# Altium PCB PCB2.PcbDoc (part 2 of 2)
Units mil, origin at the board's own origin, x right, y up, seen from the top; angles counter-clockwise.
Board outline 3235 x 2995 mil, 2 copper layers (Top Layer, Bottom Layer); 162 components, 122 nets, 435 pads, 185 vias.
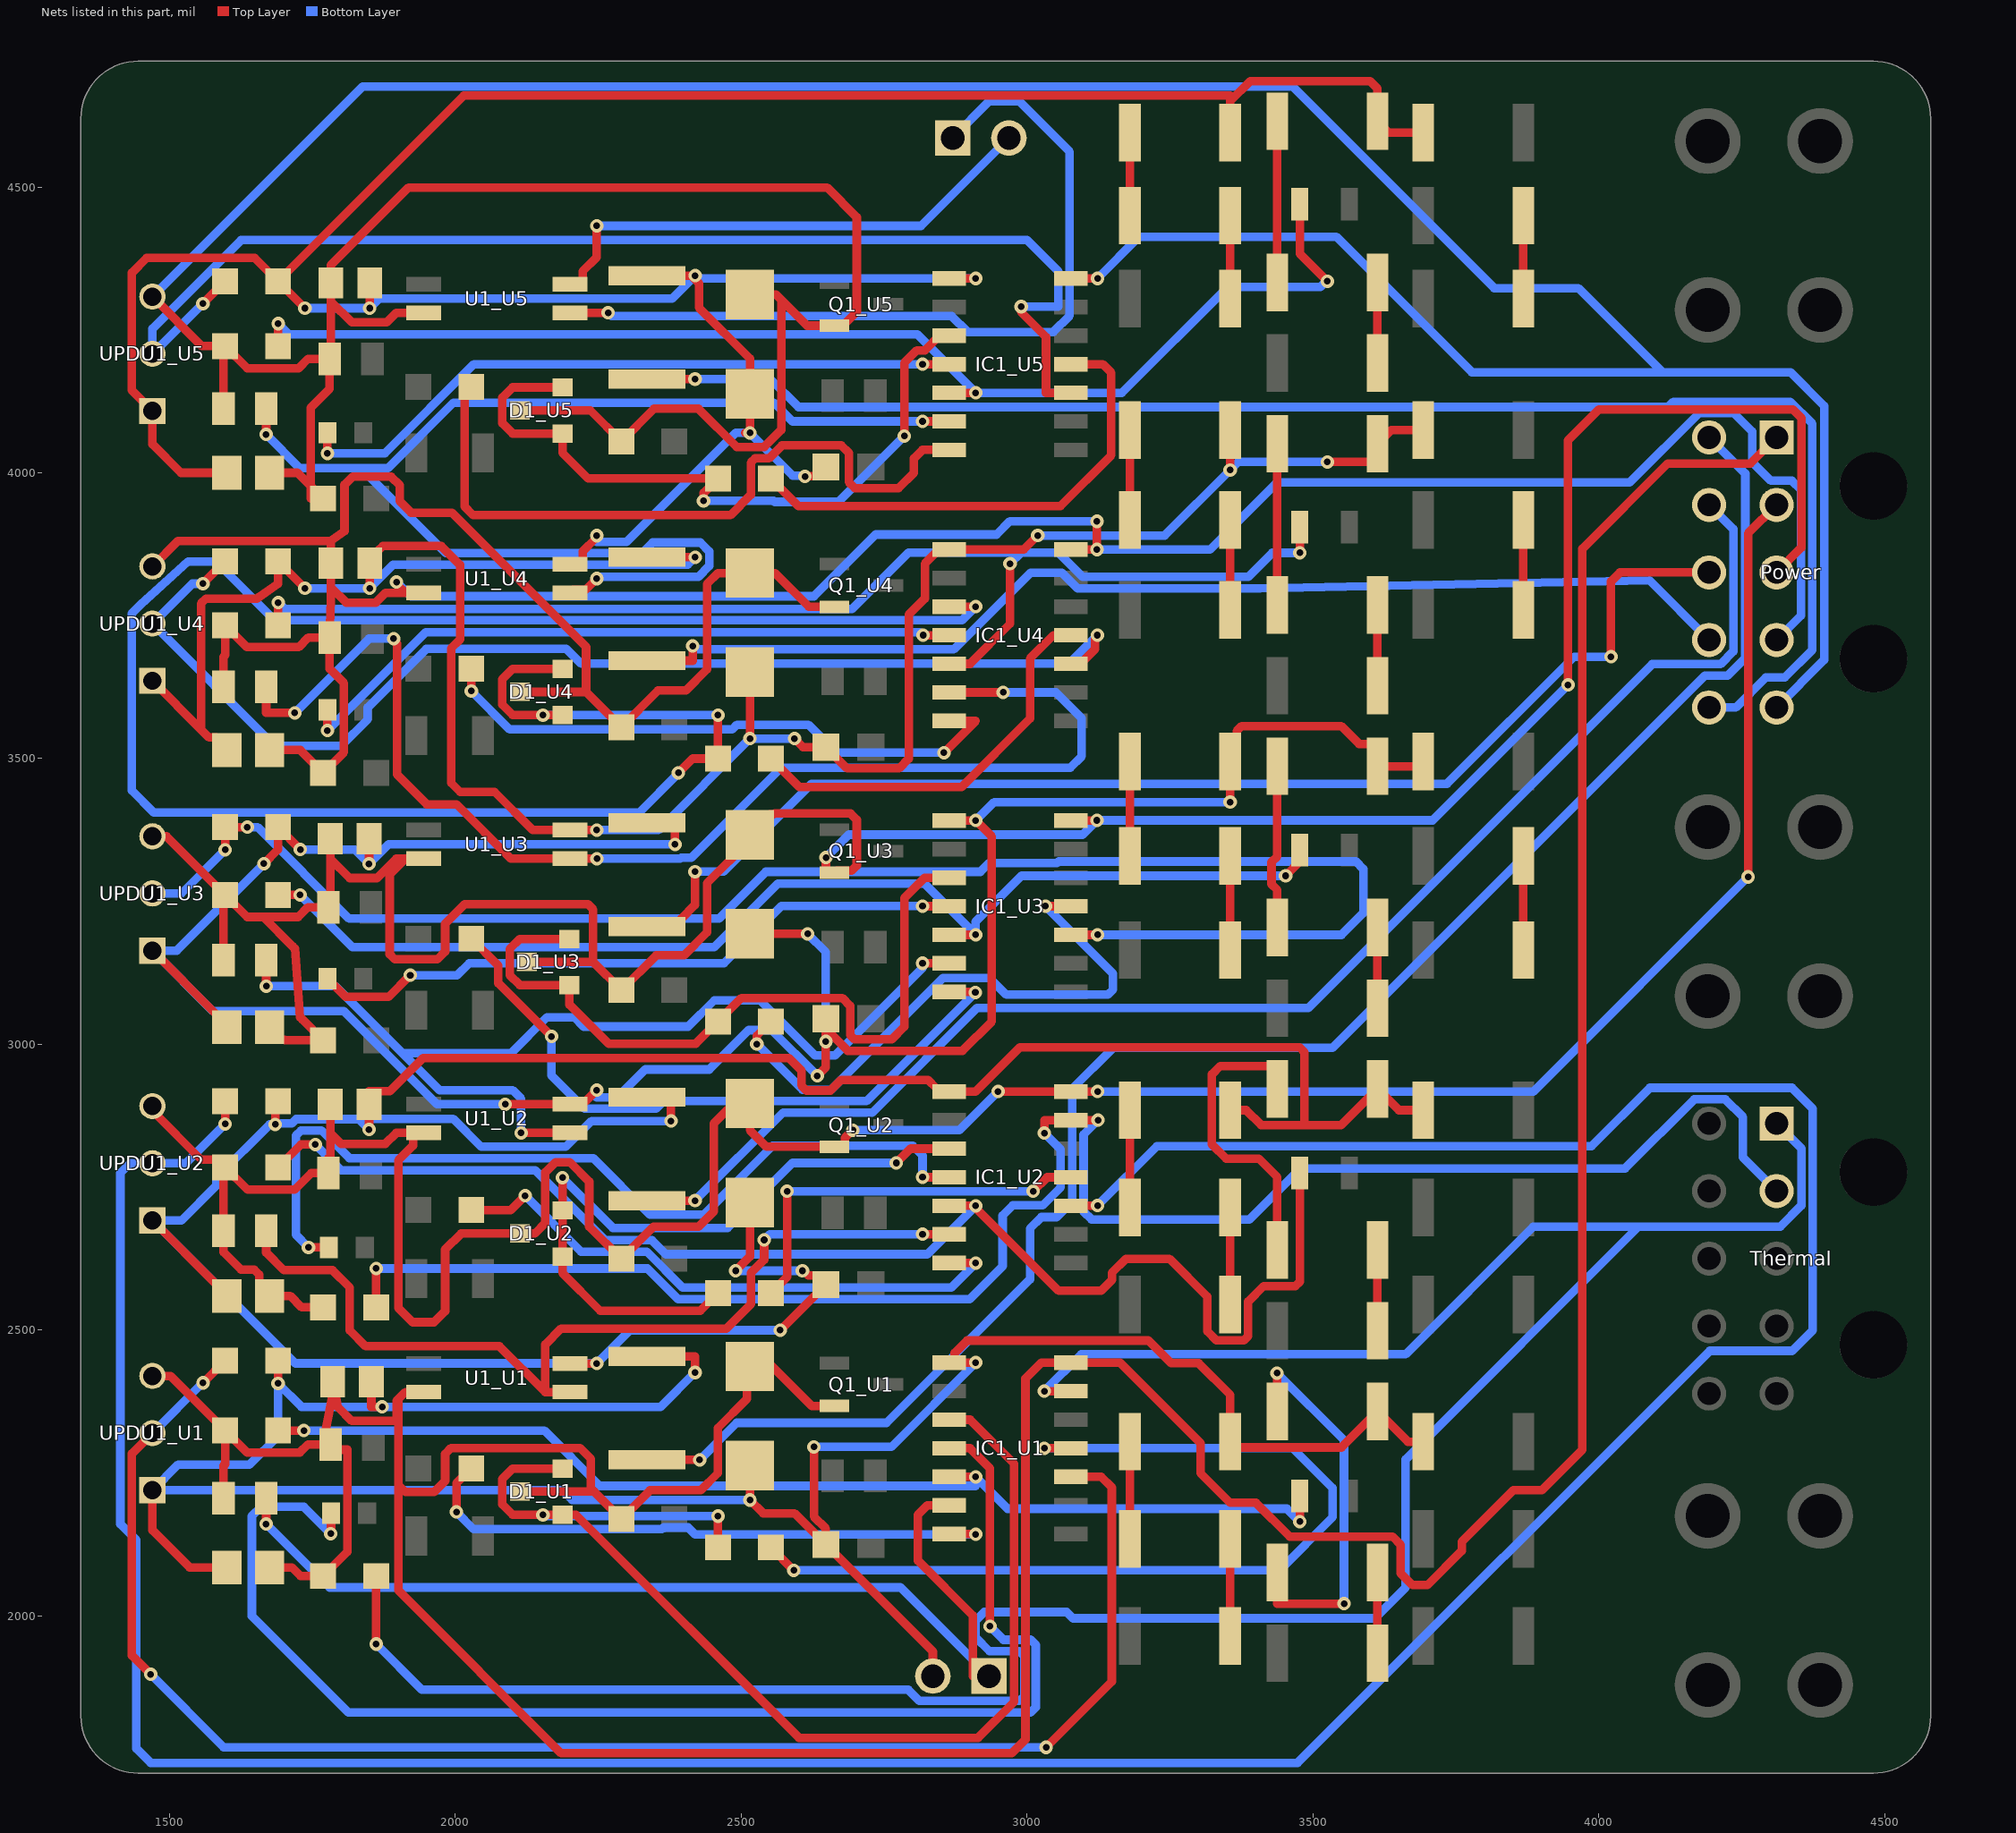
[diagram p2: the nets of this part, all layers, seen from the top]

## Via types
v1: diameter 23.62, hole 11.81, Top Layer to Bottom Layer, 183 vias
v2: diameter 23.62, hole 11.81, Top Layer to Bottom Layer, tented both sides, 2 vias

## Nets (pads, with @x,y where several pads share a name; then routed paths per layer and width w, separated by ;. In a path a pad name is that pad's centre, name@x,y a point inside that pad or via, vN(x,y) a via of type N, cw(c..) or ccw(c..) an arc to the next point about the centre after c; other vN are vias at no path point) (continued)
NetR8_U3_2: R8_U3.2 R10_U3.1 | length 165
  Top Layer w15: R10_U3.1@3867.68,3165 R8_U3.2@3867.68,3330
NetR8_U4_2: R8_U4.2 R10_U4.1 | length 157.5
  Top Layer w15: R10_U4.1@3867.68,3760 R8_U4.2@3867.68,3917.5
NetR8_U5_2: R8_U5.2 R10_U5.1 | length 145
  Top Layer w15: R10_U5.1@3867.68,4305 R8_U5.2@3867.68,4450
NetR22_U1_2: R22_U1.2 R25_U1.1 | length 690
  Top Layer w15: v1(3437,2425) 3437.32,2424.68 R22_U1.2@3437.32,2358.16 ; R25_U1.1@3437.32,2076.05 3437.32,2021.68 v1(3554.15,2021.68)
  Bottom Layer w15: v1(3437,2425) 3554.15,2307.85 v1(3554.15,2021.68)
NetR22_U2_2: R22_U2.2 R25_U2.1 | length 548.1
  Top Layer w15: R25_U2.1@3437.32,2640.26 3437.32,2768 3405.32,2800 3348,2800 3323,2825 3323,2947.5 3337.5,2962 3437.32,2962 R22_U2.2@3437.32,2922.37
NetR22_U3_2: R22_U3.2 R25_U3.1 | length 290.3
  Top Layer w15: R25_U3.1@3437.32,3204.47 3437.32,3270.33 3427.38,3280.28 3427.38,3318.96 3437.32,3328.9 R22_U3.2@3437.32,3486.58
NetR22_U4_2: R22_U4.2 R25_U4.1 | length 282.1
  Top Layer w15: R25_U4.1@3437.32,3768.68 R22_U4.2@3437.32,4050.79
NetR22_U5_2: R22_U5.2 R25_U5.1 | length 282.1
  Top Layer w15: R25_U5.1@3437.32,4332.89 R22_U5.2@3437.32,4615
NetR24_U1_2: R24_U1.2 R26_U1.1 | length 170
  Top Layer w15: R26_U1.1@3179.65,2135 R24_U1.2@3179.65,2305
NetR24_U2_2: R24_U2.2 R26_U2.1 | length 170
  Top Layer w15: R26_U2.1@3179.65,2715 R24_U2.2@3179.65,2885
NetR24_U3_2: R24_U3.2 R26_U3.1 | length 165
  Top Layer w15: R26_U3.1@3179.65,3330 R24_U3.2@3179.65,3495
NetR24_U4_2: R24_U4.2 R26_U4.1 | length 157.5
  Top Layer w15: R26_U4.1@3179.65,3917.5 R24_U4.2@3179.65,4075
NetR24_U5_2: R24_U5.2 R26_U5.1 | length 145
  Top Layer w15: R26_U5.1@3179.65,4450 R24_U5.2@3179.65,4595
NetR25_U1_2: R25_U1.2 R27_U1.1 | length 141.1
  Top Layer w15: R27_U1.1@3612.68,1935 R25_U1.2@3612.68,2076.05
NetR25_U2_2: R25_U2.2 R27_U2.1 | length 141.1
  Top Layer w15: R27_U2.1@3612.68,2499.21 R25_U2.2@3612.68,2640.26
NetR25_U3_2: R25_U3.2 R27_U3.1 | length 141.1
  Top Layer w15: R27_U3.1@3612.68,3063.42 R25_U3.2@3612.68,3204.47
NetR25_U4_2: R25_U4.2 R27_U4.1 | length 141.1
  Top Layer w15: R27_U4.1@3612.68,3627.63 R25_U4.2@3612.68,3768.68
NetR25_U5_2: R25_U5.2 R27_U5.1 | length 141.1
  Top Layer w15: R27_U5.1@3612.68,4191.84 R25_U5.2@3612.68,4332.89
NetR26_U1_2: R26_U1.2 R28_U1.1 | length 170
  Top Layer w15: R28_U1.1@3355,1965 R26_U1.2@3355,2135
NetR26_U2_2: R26_U2.2 R28_U2.1 | length 170
  Top Layer w15: R28_U2.1@3355,2545 R26_U2.2@3355,2715
NetR26_U3_2: R26_U3.2 R28_U3.1 | length 165
  Top Layer w15: R28_U3.1@3355,3165 R26_U3.2@3355,3330
NetR26_U4_2: R26_U4.2 R28_U4.1 | length 157.5
  Top Layer w15: R28_U4.1@3355,3760 R26_U4.2@3355,3917.5
NetR26_U5_2: R26_U5.2 R28_U5.1 | length 145
  Top Layer w15: R28_U5.1@3355,4305 R26_U5.2@3355,4450
NetTx_1: Tx.1 U1_U5.3 | length 1454.7
  Top Layer w15: U1_U5.3@2200.04,4280.02 v1(2267,4280.02)
  Bottom Layer w15: v1(2267,4280.02) 2273.02,4274 2868,4274 2895.69,4246.31 3045.59,4246.31 3074.27,4275 3074.27,4561.56 2985.84,4650 2933.84,4650 Tx.1@2869.51,4585.67
NetTx_2: Tx.2 U1_U5.4 | length 916.1
  Top Layer w15: U1_U5.4@2200.04,4330.02 2217.31,4330.02 2222.6,4335.31 2222.6,4352.58 2247,4376.98 v1(2247,4432)
  Bottom Layer w15: v1(2247,4432) 2814.26,4432 Tx.2@2967.93,4585.67
PA3_U1: IC1_U1.13 R21_U1.2 Thermal.1 | length 4746.3
  Top Layer w15: v1(1861.26,1951) R21_U1.2@1861.26,2070 ; v1(3029.96,2393.45) IC1_U1.13@3076.3,2393.45
  Bottom Layer w15: v1(1861.26,1951) 1941.26,1871 2792,1871 2811.5,1851.5 2986.21,1851.5 2995,1860.28 2995,1929.72 2986.21,1938.5 2934,1938.5 2910,1962.5 2910,1992 2925,2007 3069,2007 3080,1996 3608,1996 3662,2050 3662,2274 4069.09,2681.09 ; v1(3029.96,2393.45) 3094.52,2458 3662,2458 3885.09,2681.09 4069.09,2681.09 ; Thermal.1@4310.71,2861.62 4354,2818.33 4354,2718 4317.09,2681.09 4069.09,2681.09
PA3_U2: IC1_U2.13 R21_U2.2 Thermal.2 | length 3227.3
  Top Layer w15: R21_U2.2@1861.26,2540 v1(1861.26,2608) ; v1(3030,2844.73) 3030,2867.58 IC1_U2.13@3076.3,2867.58 v1(3124,2867.58)
  Bottom Layer w15: v1(1861.26,2608) 2335.71,2608 2389.1,2554.62 2899.62,2554.62 2957,2612 2957,2700.69 2975,2718.69 3027.38,2718.69 3058.69,2750 3058.69,2816.04 v1(3030,2844.73) ; v1(3124,2867.58) 3098.69,2842.27 3098.69,2707.5 3112.5,2693.69 3388.69,2693.69 3478,2783 4045.68,2783 4166.72,2904.04 4220.96,2904.04 4252,2873 4252,2802.22 Thermal.2@4310.71,2743.51
PA6_U1: D4_U1.2 IC1_U1.4 | length 2384.8
  Top Layer w15: v1(1782,2144) 1782.48,2144.48 D4_U1.2@1782.48,2180 ; IC1_U1.4@2863.7,2293.45 2900,2293.45 2935,2258.45 v1(2935,1982)
  Bottom Layer w15: v1(1782,2144) 1735,2191 1660,2191 1644,2175 1644,2000 1812.5,1831.5 3006.21,1831.5 3015,1840.28 3015,1949.72 3006.21,1958.5 2958.5,1958.5 v1(2935,1982)
PA6_U2: D4_U2.2 IC1_U2.4 | length 1542.5
  Top Layer w15: v1(1743,2645) D4_U2.2@1778.5,2645 ; v1(2817,2768) 2817.42,2767.58 IC1_U2.4@2863.7,2767.58
  Bottom Layer w15: v1(1743,2645) 1720.86,2667.14 1720.86,2840.41 1729.76,2849.31 1766,2849.31 1814.33,2800.98 2241.02,2800.98 2340,2702 2434,2702 2554.69,2822.69 2800,2822.69 2817,2805.69 v1(2817,2768)
PA6_U3: D4_U3.2 IC1_U3.4 | length 1168.7
  Top Layer w15: D4_U3.2@1776.14,3115 1776.14,3112.05 1784.39,3103.8 1787.34,3103.8 1808.14,3083 1883,3083 v1(1921,3121) ; v1(2817,3242) 2817,3241.72 IC1_U3.4@2863.7,3241.72
  Bottom Layer w15: v1(1921,3121) 2003,3121 2024,3142 2469.82,3142 2569.82,3242 v1(2817,3242)
PA6_U4: D4_U4.2 IC1_U4.4 | length 1197
  Top Layer w15: v1(1776.14,3549.14) D4_U4.2@1776.14,3585 ; v1(2818,3716) 2818.14,3715.86 IC1_U4.4@2863.7,3715.86
  Bottom Layer w15: v1(1776.14,3549.14) 1948.31,3721.31 2812.69,3721.31 v1(2818,3716)
PA6_U5: D4_U5.2 IC1_U5.4 | length 1188.2
  Top Layer w15: v1(1776.14,4034) D4_U5.2@1776.14,4070 ; v1(2817,4190) IC1_U5.4@2863.7,4190
  Bottom Layer w15: v1(1776.14,4034) 1876.38,4034 2032.38,4190 v1(2817,4190)
PA7_U1: IC1_U1.5 R19_U1.2 R20_U1.2 | length 1966.3
  Top Layer w15: R20_U1.2@1689.76,2324.44 v1(1735,2324.44) ; IC1_U1.5@2863.7,2243.45 v1(2910,2243.45) ; v1(3476.69,2165.31) R19_U1.2@3476.69,2210
  Bottom Layer w15: v1(1735,2324.44) 2155.56,2324.44 2252.42,2227.58 2910,2227.58 v1(2910,2243.45) 2965.69,2187.76 3454.24,2187.76 v1(3476.69,2165.31)
PA7_U2: IC1_U2.5 R19_U2.2 R20_U2.2 | length 2423.1
  Top Layer w15: R20_U2.2@1689.76,2785.06 1729.7,2825 v1(1755,2825) ; IC1_U2.5@2863.7,2717.58 v1@2906.42,2717.58 ; v1(2910.04,2717.58) v1@2906.42,2717.58 ; R19_U2.2@3476.69,2775 3476.69,2584.69 3469,2577 3413.36,2577 3386.36,2550 3386.36,2489.46 3379.04,2482.14 3330.96,2482.14 3315,2498.1 3315,2558.64 3248.64,2625 3172.75,2625 3148.28,2600.54 3148.28,2587.78 3129.5,2569 3055,2569 v1@2906.42,2717.58
  Bottom Layer w15: v1(1755,2825) 1800,2780 2139.6,2780 2262.18,2657.42 2343.58,2657.42 2368,2633 2825.45,2633 v1(2910.04,2717.58)
PA7_U3: IC1_U3.5 R19_U3.2 R20_U3.2 | length 2041.1
  Top Layer w15: R20_U3.2@1689.76,3261.54 v1(1728.46,3261.54) ; IC1_U3.5@2863.7,3191.72 v1(2910.04,3191.72) v1@2910,3191.76 ; v1(3452,3295) 3476.69,3319.69 R19_U3.2@3476.69,3340
  Bottom Layer w15: v1(1728.46,3261.54) 1820,3170 2452.58,3170 2563.58,3281 2820.76,3281 2864,3237.76 v1@2910,3191.76 ; v1(2910.04,3191.72) v1@2910,3191.76 ; v1(3452,3295) 2990.06,3295 2910,3214.94 v1@2910,3191.76
PA7_U4: IC1_U4.5 R19_U4.2 R20_U4.2 | length 2219.2
  Top Layer w15: R20_U4.2@1689.76,3733.21 1690,3733.44 v1(1690,3773) ; IC1_U4.5@2863.7,3665.86 2900,3665.86 2970,3735.86 v1(2970,3841) ; v1(3476.69,3860) R19_U4.2@3476.69,3905
  Bottom Layer w15: v1(1690,3773) 1701,3762 2694,3762 2792.17,3860.17 2989.17,3860.17 ; v1(2970,3841) 2989.17,3860.17 ; v1(3476.69,3860) 3428.76,3860 3386.76,3818 3096.87,3818 3054.7,3860.17 2989.17,3860.17
PA7_U5: IC1_U5.5 R19_U5.2 R20_U5.2 | length 2206.8
  Top Layer w15: R20_U5.2@1689.76,4221.54 1690,4221.78 v1(1690,4261) ; IC1_U5.5@2863.7,4140 v1(2910.04,4140) ; R19_U5.2@3476.69,4470 3476.69,4383.31 v1(3525,4335)
  Bottom Layer w15: v1(1690,4261) 1709,4242 2808.04,4242 2837,4213.04 v1(2910.04,4140) 3165.62,4140 3350.62,4325 3512.67,4325 3522.67,4335 v1(3525,4335)
"Power 1 U1": C1_U1.1 C2_U1.2 D1_U1.3 D2_U1.2 IC1_U1.14 Power.1 Q1_U1.2 R15_U1.2 R16_U1.1 R18_U1.2 R20_U1.1 R21_U1.1 U1_U1.2 UPDU1_U1.03 | length 7969.7
  Top Layer w15: UPDU1_U1.03@1470,2420.02 1501.67,2420.02 R20_U1.1@1597.24,2324.44 ; R16_U1.1@1594.29,2206.42 1594.29,2263 1597.24,2265.95 R20_U1.1@1597.24,2324.44 ; C1_U1.1@1675,2085 1714,2085 1729,2070 R21_U1.1@1768.74,2070 1811,2112.26 1811,2291 1781.58,2291 R18_U1.2@1781.58,2300 ; C2_U1.2@1785,2410 C2_U1.2@1787.12,2399.91 ; C2_U1.2@1787.43,2398.41 1786.75,2394.91 1772.23,2319.86 1772.23,2313.83 1774.81,2310.02 1776.44,2307.61 R18_U1.2@1781.58,2300 ; C2_U1.2@1788.23,2394.62 1792.03,2376.47 1794.29,2365.71 1818.77,2341.23 1897,2341.23 1897,2376.37 1900,2379.37 ; U1_U1.2@1944.13,2391.87 1912.5,2391.87 1900,2379.37 ; D1_U1.3@2112.79,2217.56 2242.56,2217.56 ; Q1_U1.2@2663,2367.46 2623.16,2367.46 2554,2436.61 D2_U1.2@2515,2436.61 2509.59,2431.21 2509.59,2379.59 2459,2329 2459,2250 2429,2220 2340.12,2220 R15_U1.2@2290.12,2170 2242.56,2217.56 ; Power.1@4310.71,4061.94 4264.77,4016 4120,4016 3971,3867 3971,2291 3900,2220 3850,2220 3760,2130 3760,2114 3700,2054 3674,2054 3653,2075 3653,2125 3639,2139 3459,2139 3400,2198 3355,2198 3303,2250 3303,2302.45 3162,2443.45 IC1_U1.14@3076.3,2443.45 3025,2443.45 2997,2415.45 2997,1784 2973,1760 2185,1760 1900,2045 1900,2229.5 ; R20_U1.1@1597.24,2324.44 1635.69,2286 1728,2286 1742,2300 R18_U1.2@1781.58,2300 ; 1900,2229.5 1900,2379.37 ; 1900,2229.5 1912.5,2217 1962.5,2217 1982,2236.5 1982,2283.63 1992.37,2294 2218,2294 2237,2275 2237,2223.12 2242.56,2217.56
"Power 1 U2": C1_U2.1 C2_U2.2 D1_U2.3 D2_U2.2 IC1_U2.14 Power.2 Q1_U2.2 R15_U2.2 R16_U2.1 R18_U2.2 R20_U2.1 R21_U2.1 U1_U2.2 UPDU1_U2.03 | length 5227.7
  Top Layer w15: UPDU1_U2.03@1470,2892.06 1470,2883.73 1555.24,2798.48 1583.82,2798.48 R20_U2.1@1597.24,2785.06 ; R21_U2.1@1768.74,2540 1731,2540 1711,2560 C1_U2.1@1675,2560 1656.91,2578.09 1656.91,2597.21 1648.12,2606 1625,2606 1594.29,2636.71 R16_U2.1@1594.29,2674.23 1594.29,2782.11 R20_U2.1@1597.24,2785.06 ; C2_U2.2@1781.02,2895 1781.02,2844.98 ; U1_U2.2@1944.13,2845.29 U1_U2.2@1926,2845.29 ; D2_U2.2@2515,2896.61 D2_U2.2@2515,2886 ; v1(2695,2850) 2694.6,2850 2681.5,2836.9 2681.5,2824.38 2678,2820.88 2642.31,2820.88 2636.62,2820.88 2544.12,2820.88 2515,2850 D2_U2.2@2515,2886 ; v1(2949,2917.58) IC1_U2.14@3076.3,2917.58 v1(3123,2917.58) ; v1(4261,3293) 4261,3894.12 Power.2@4310.71,3943.83 ; R20_U2.1@1597.24,2785.06 1636.3,2746 1719,2746 1748,2775 R18_U2.2@1777.6,2775 1777.6,2800.69 1781.02,2804.11 1781.02,2844.98 ; 1781.02,2844.98 1800,2826 1877.52,2826 1896.81,2845.29 U1_U2.2@1926,2845.29 ; U1_U2.2@1926,2845.29 1926,2823 1900,2797 1900,2539 1925,2514 1962.5,2514 1982,2533.5 1982,2641.27 2010,2669.27 D1_U2.3@2112.79,2669.27 2138.98,2669.27 2157.2,2687.5 2157.2,2776.2 2175,2794 2200,2794 2234,2760 2234,2681.12 R15_U2.2@2290.12,2625 2346.12,2681 2425,2681 2452,2708 2452,2862 2476,2886 D2_U2.2@2515,2886
  Bottom Layer w15: v1(2695,2850) 2881.42,2850 v1(2949,2917.58) ; v1(3123,2917.58) 3885.58,2917.58 v1(4261,3293)
"Power 1 U3": C1_U3.1 C2_U3.2 D1_U3.3 D2_U3.2 IC1_U3.14 Power.3 Q1_U3.2 R15_U3.2 R16_U3.1 R18_U3.2 R20_U3.1 R21_U3.1 U1_U3.2 UPDU1_U3.03 | length 5438.3
  Top Layer w15: UPDU1_U3.03@1470,3364.1 1494.69,3364.1 R20_U3.1@1597.24,3261.54 ; R16_U3.1@1594.29,3147.47 1594.29,3258.59 R20_U3.1@1597.24,3261.54 ; C1_U3.1@1675,3030 1675,3026.06 1693.09,3007.97 1701.17,3007.97 1701.88,3007.26 R21_U3.1@1768.74,3007.26 1732.23,3043.77 1728.3,3047.71 1719.29,3167.71 1715.36,3171.64 1664,3223 ; C2_U3.2@1781.02,3360 1781.02,3325 ; U1_U3.2@1944.13,3325.02 1912.5,3325.02 ; D1_U3.3@2125,3144.13 2240.98,3144.13 ; v1(2648,3327) 2648,3300.61 Q1_U3.2@2663,3300.61 2666.5,3304.11 2693.21,3304.11 2702,3312.89 2702,3393 2691,3404 2558.61,3404 2557.03,3402.42 2549.82,3402.42 2515,3367.6 2515,3357 2440.18,3282.18 2440.18,3196.18 2400,3156 2351.12,3156 R15_U3.2@2290.12,3095 2240.98,3144.13 ; IC1_U3.14@3076.3,3391.72 3121.72,3391.72 v1(3122,3392) ; v1(3946,3629) 3946,4057 4000,4111 4339.17,4111 4354,4096.17 4354,3869.01 Power.3@4310.71,3825.72 ; R20_U3.1@1597.24,3261.54 1635.79,3223 1664,3223 ; 1664,3223 1725,3223 1742,3240 R18_U3.2@1777.6,3240 1781.02,3243.42 1781.02,3325 ; 1781.02,3325 1815.02,3291 1862.79,3291 1896.81,3325.02 1912.5,3325.02 ; 1912.5,3325.02 1885,3297.52 1885,3157.79 1893.79,3149 1968.5,3149 1982,3162.5 1982,3211 2016,3245 2232.2,3245 2240.98,3236.21 2240.98,3144.13
  Bottom Layer w15: v1(2648,3327) 2688,3367 3097,3367 v1(3122,3392) 3709,3392 v1(3946,3629)
"Power 1 U4": C1_U4.1 C2_U4.2 D1_U4.3 D2_U4.2 IC1_U4.14 Power.4 Q1_U4.2 R15_U4.2 R16_U4.1 R18_U4.2 R20_U4.1 R21_U4.1 U1_U4.2 UPDU1_U4.03 | length 6030.9
  Top Layer w15: UPDU1_U4.03@1470,3836.13 1514.87,3881 1782.05,3881 ; R16_U4.1@1594.29,3625.81 1594.29,3678.07 1597.24,3681.02 R20_U4.1@1597.24,3733.21 1635.45,3695 1726,3695 1742.72,3711.72 R18_U4.2@1780.08,3711.72 ; C1_U4.1@1675,3515 1728.74,3515 R21_U4.1@1768.74,3475 1805,3511.26 1805,3632.08 1780.08,3657 R18_U4.2@1780.08,3711.72 ; v1(1897,3809) 1897,3805.52 1912.5,3790.02 ; U1_U4.2@1944.13,3790.02 1912.5,3790.02 ; D1_U4.3@2112.79,3616.63 2228.48,3616.63 ; Q1_U4.2@2663,3765.61 2618.01,3765.61 2559,3824.61 D2_U4.2@2515,3824.61 2459.17,3824.61 2440.18,3805.62 2440.18,3656.18 2403,3619 2354.12,3619 R15_U4.2@2290.12,3555 2228.48,3616.63 ; IC1_U4.14@3076.3,3865.86 v1(3122,3865.86) v1(3122,3915.17) ; R18_U4.2@1780.08,3711.72 1782.05,3776.97 1782.05,3800 ; 1782.05,3800 C2_U4.2@1782.05,3841.99 1782.05,3874 1782.05,3881 ; 1782.05,3800 1809.05,3773 1861,3773 1878.02,3790.02 1912.5,3790.02 ; 1782.05,3881 1806,3897.95 1806,3979 1820.28,3993.28 1887.5,3993.28 1902.72,3978.05 1902.72,3950 1922.46,3930.26 1993.74,3930.26 2228.48,3695.52 2228.48,3616.63
  Bottom Layer w15: v1(1897,3809) 1922,3784 2627,3784 2735,3892 2946.51,3892 2969.69,3915.17 v1(3122,3915.17) ; v1(3122,3865.86) 3319.86,3865.86 3437,3983 4053.64,3983 4175,4104.36 4236,4104.36 4268,4072.36 4268,4019 4300.75,3986.25 4337.5,3986.25 4353.13,3970.62 4353.13,3750.03 Power.4@4310.71,3707.61
"Power 1 U5": C1_U5.1 C2_U5.2 D1_U5.3 D2_U5.2 IC1_U5.14 Power.5 Q1_U5.2 R15_U5.2 R16_U5.1 R18_U5.2 R20_U5.1 R21_U5.1 U1_U5.2 UPDU1_U5.03 | length 8406.7
  Top Layer w15: UPDU1_U5.03@1470,4308.17 1556.63,4221.54 R20_U5.1@1597.24,4221.54 ; R16_U5.1@1594.29,4112.47 1594.29,4218.59 R20_U5.1@1597.24,4221.54 ; C1_U5.1@1675,4000 1723.74,4000 R21_U5.1@1747,3976.74 ; U1_U5.2@1944.13,4280.02 1896.81,4280.02 1879.79,4263 1819.05,4263 1782.05,4300 ; D1_U5.3@2112.79,4109.13 2235.98,4109.13 R15_U5.2@2290.12,4055 2347.12,4112 2425,4112 2491.86,4045.14 2540.14,4045.14 2570,4075 2570,4302.61 ; D2_U5.2@2515,4311.61 2561,4311.61 2570,4302.61 ; IC1_U5.14@3076.3,4340 v1(3123,4340) ; R20_U5.1@1597.24,4221.54 1635.79,4183 1726,4183 1742.22,4199.22 R18_U5.2@1780.08,4199.22 ; R21_U5.1@1747,3976.74 1747,3955 R21_U5.1@1768.74,3955 R21_U5.1@1747,3976.74 ; R21_U5.1@1747,3976.74 1747,4114 1780.08,4147.08 R18_U5.2@1780.08,4199.22 ; R18_U5.2@1780.08,4199.22 1782.05,4201.19 1782.05,4300 ; 1782.05,4300 C2_U5.2@1782.05,4331.99 1782.05,4363.05 1918,4499 2650,4499 2702,4447 2702,4282 2681.5,4261.5 2681.5,4261 2678,4257.5 2615.11,4257.5 2570,4302.61
  Bottom Layer w15: UPDU1_U5.03@1470,4308.17 1837.83,4676 3464,4676 3817,4323 3964,4323 4111,4176 ; v1(3123,4340) 3196,4413 3540.62,4413 3777.62,4176 4111,4176 ; Power.5@4310.71,3589.5 4394,3672.79 4394,4117 4335,4176 4111,4176
"Power 2 U1": F1_U1.1 Power.6 | length 3082.2
  Top Layer w15: F1_U1.1@2335,2273.17 v1(2427,2273.17)
  Bottom Layer w15: v1(2427,2273.17) 2491.83,2338 2754,2338 3005,2589 3005,2677.95 3025,2697.95 3051.64,2697.95 3078.69,2725 3078.69,2922.69 3150,2994 3534,2994 4185,3645 4225,3645 4256,3676 4256,3998.54 Power.6@4192.6,4061.94
"Power 2 U2": F1_U2.1 Power.7 | length 2571.9
  Top Layer w15: F1_U2.1@2335,2726.59 v1(2419,2726.59)
  Bottom Layer w15: v1(2419,2726.59) 2573.09,2880.69 2729.01,2880.69 2912.32,3064 3492,3064 4093.19,3665.19 4212.71,3665.19 4235.02,3687.5 4235.02,3901.41 Power.7@4192.6,3943.83
"Power 2 U3": F1_U3.1 Power.8 | length 2228
  Top Layer w15: F1_U3.1@2335,3206.32 2385.79,3206.32 2395.02,3215.55 2395.02,3220.02 2419,3244 v1(2419,3302.16) ; v1(4021,3678.31) 4021,3810 4036.72,3825.72 Power.8@4192.6,3825.72
  Bottom Layer w15: v1(2419,3302.16) 2469,3302.16 2622.84,3456 3734.38,3456 3956.69,3678.31 v1(4021,3678.31)
"Power 2 U4": F1_U4.1 Power.9 | length 1995.8
  Top Layer w15: F1_U4.1@2335,3671.32 2415,3671.32 v1(2415,3697)
  Bottom Layer w15: v1(2415,3697) 2421,3691 2871.65,3691 3005.65,3825 3061,3825 3088,3798 3407,3798 4088.21,3812 Power.9@4192.6,3707.61
"Power 2 U5": F1_U5.1 Power.10 | length 2696.2
  Top Layer w15: F1_U5.1@2335,4163.9 v1(2419.1,4163.9)
  Bottom Layer w15: v1(2419.1,4163.9) 2551.1,4163.9 2600,4115 4120.82,4115 4130.18,4124.36 4334.64,4124.36 4373.13,4085.87 4373.13,3690.13 4325,3642 4291.83,3642 4239.33,3589.5 Power.10@4192.6,3589.5
"REF EN_U1": IC1_U1.11 R2_U1.2 | length 1667.6
  Top Layer w15: R2_U1.2@2551.76,2120 v1(2591.76,2080) ; v1(3030,2293.45) IC1_U1.11@3076.3,2293.45
  Bottom Layer w15: v1(2591.76,2080) 3441.15,2080 3534.15,2173 3534.15,2223.85 3464.55,2293.45 v1(3030,2293.45)
"REF EN_U2": IC1_U2.11 R2_U2.2 | length 696.2
  Top Layer w15: R2_U2.2@2551.76,2565 2580,2593.24 v1(2580,2743) ; v1(3010.42,2743) 3035,2767.58 IC1_U2.11@3076.3,2767.58
  Bottom Layer w15: v1(2580,2743) v1(3010.42,2743)
"REF EN_U3": IC1_U3.11 R2_U3.2 | length 1041.9
  Top Layer w15: v1(2527,3000.69) 2527,3015.24 R2_U3.2@2551.76,3040 ; v1(3031.93,3242) 3032.21,3241.72 IC1_U3.11@3076.3,3241.72
  Bottom Layer w15: v1(2527,3000.69) 2527.31,3000.69 2607.31,2920.69 2657.14,2920.69 2852.49,3116.04 2934.35,3116.04 2963.39,3087 3141.21,3087 3150,3095.79 3150,3123.93 v1(3031.93,3242)
"REF EN_U4": IC1_U4.11 R2_U4.2 | length 716.9
  Top Layer w15: R2_U4.2@2551.76,3500 2601.76,3450 2885,3450 3005,3570 3005,3675 3045.86,3715.86 IC1_U4.11@3076.3,3715.86
"REF EN_U5": IC1_U5.11 R2_U5.2 | length 873.1
  Top Layer w15: R2_U5.2@2551.76,3990 2599.76,3942 3058.38,3942 3147,4030.62 3147,4175 3132,4190 IC1_U5.11@3076.3,4190
RESET_U1: IC1_U1.10 R1_U1.1 UPDU1_U1.02 | length 2831
  Top Layer w15: v1(1467,1898) 1434,1931 1434,2284.02 UPDU1_U1.02@1470,2320.02 ; v1(1558.39,2408) R1_U1.1@1597.24,2446.85 ; v1(3033,1770.25) 3148,1885.25 3148,2225 3129.55,2243.45 IC1_U1.10@3076.3,2243.45
  Bottom Layer w15: v1(1467,1898) 1594.75,1770.25 v1(3033,1770.25) ; UPDU1_U1.02@1470,2320.02 1557.98,2408 v1(1558.39,2408)
RESET_U2: IC1_U2.10 R1_U2.1 UPDU1_U2.02 | length 6318.6
  Top Layer w15: v1(1597.24,2860.83) R1_U2.1@1597.24,2900.28 ; IC1_U2.10@3076.3,2717.58 3122.58,2717.58 v1(3123,2718)
  Bottom Layer w15: v1(1597.24,2860.83) 1528.48,2792.06 UPDU1_U2.02@1470,2792.06 1431.06,2792.06 1414,2775 1414,2161 1442,2133 1442,1768 1467,1743 3473,1743 4194,2464 4338,2464 4374,2500 4374,2887.5 4337.46,2924.04 4089.04,2924.04 3987,2822 3227,2822 v1(3123,2718)
RESET_U3: IC1_U3.10 R1_U3.1 UPDU1_U3.02 | length 2906.8
  Top Layer w15: v1(1597.24,3340.55) R1_U3.1@1597.24,3380 v1(1636,3380) ; IC1_U3.10@3076.3,3191.72 v1(3123,3191.72)
  Bottom Layer w15: UPDU1_U3.02@1470,3264.1 1520.79,3264.1 v1(1597.24,3340.55) ; v1(1636,3380) 1654,3380 1814,3220 2461,3220 2543,3302 2918,3302 2933,3317 3052,3317 3055,3320 3575,3320 3588,3307 3588,3230 3549.72,3191.72 v1(3123,3191.72)
RESET_U4: IC1_U4.10 R1_U4.1 UPDU1_U4.02 | length 2107.2
  Top Layer w15: v1(1558.24,3806) R1_U4.1@1597.24,3845 ; IC1_U4.10@3076.3,3665.86 3093.03,3665.86 3118.33,3691.16 3118.33,3709.13 3122.86,3713.67 v1(3122.86,3716)
  Bottom Layer w15: v1(1558.24,3806) 1539.87,3806 UPDU1_U4.02@1470,3736.13 1684.13,3522 1800,3522 1846.52,3568.52 1846.52,3589.3 1949.22,3692 2194,3692 2220,3666 3072.86,3666 v1(3122.86,3716)
RESET_U5: IC1_U5.10 R1_U5.1 UPDU1_U5.02 | length 2233.4
  Top Layer w15: v1(1558.24,4296) R1_U5.1@1597.24,4335 ; v1(2989.5,4290.69) 2989.5,4281 3033,4237.5 3033,4140 IC1_U5.10@3076.3,4140
  Bottom Layer w15: v1(1558.24,4296) 1557.83,4296 UPDU1_U5.02@1470,4208.17 1470,4252 1625,4407 3000,4407 3054.27,4352.73 3054.27,4290.69 v1(2989.5,4290.69)
RXDO_U1: IC1_U1.6 R16_U1.2 Rx.1 | length 1832
  Top Layer w15: v1(1669,2161) 1669.09,2161.09 R16_U1.2@1669.09,2206.42 ; IC1_U1.6@2863.7,2193.45 2825,2193.45 2809,2177.45 2809,2097 2905,2001 2905,1895 Rx.1@2933.43,1895
  Bottom Layer w15: v1(1669,2161) 1780,2050 2778.43,2050 Rx.1@2933.43,1895
RXDO_U2: IC1_U2.6 R16_U2.2 U1_U1.3 | length 1636.4
  Top Layer w15: R16_U2.2@1669.09,2674.23 1669.09,2635.91 1700,2605 1785,2605 1815,2575 1815,2500 1843,2472 2076.87,2472 2157,2391.87 ; U1_U1.3@2200.04,2391.87 2157,2391.87 ; v1(2540,2658) 2540,2623.52 2516.62,2600.14 2516.62,2545.62 2474,2503 2185,2503 2157,2475 2157,2391.87 ; v1(2817,2668) 2817.42,2667.58 IC1_U2.6@2863.7,2667.58
  Bottom Layer w15: v1(2540,2658) 2550,2668 v1(2817,2668)
RXDO_U3: IC1_U3.6 R16_U3.2 U1_U2.3 | length 1837.4
  Top Layer w15: v1(1669.09,3102) R16_U3.2@1669.09,3147.47 ; v1(2115,2845.29) U1_U2.3@2200.04,2845.29 ; v1(2817,3142) 2817.28,3141.72 IC1_U3.6@2863.7,3141.72
  Bottom Layer w15: v1(1669.09,3102) 1790,3102 1907,2985 ; v1(2115,2845.29) 2115,2905 2100,2920 1972,2920 1907,2985 ; v1(2817,3142) 2817,3134 2663.69,2980.69 2629,2980.69 2532.69,3077 2452.71,3077 2406.95,3031.24 2224.07,3031.24 2208,3047.31 2160,3047.31 2097.69,2985 1907,2985
RXDO_U4: IC1_U4.6 R16_U4.2 U1_U3.3 | length 2212.5
  Top Layer w15: R16_U4.2@1669.09,3625.81 1669.09,3580 v1(1719,3580) ; v1(1892,3710) 1892,3707.67 1898,3701.67 1898,3472 1950,3420 2002,3420 2096.98,3325.02 U1_U3.3@2200.04,3325.02 v1(2247.36,3325.02) ; IC1_U4.6@2863.7,3615.86 v1(2958,3615.86)
  Bottom Layer w15: v1(1719,3580) 1849,3710 v1(1892,3710) ; v1(2247.36,3325.02) 2393.23,3325.02 2394.69,3326.47 2412.47,3326.47 2570,3484 3075.37,3484 3095.37,3504 3095.37,3570.63 3050.14,3615.86 v1(2958,3615.86)
RXDO_U5: IC1_U5.6 R16_U5.2 U1_U4.3 | length 2299.3
  Top Layer w15: v1(1669,4067) 1669.09,4067.09 R16_U5.2@1669.09,4112.47 ; U1_U4.3@2200.04,3790.02 2205.33,3795.31 2227.31,3795.31 v1(2247,3815) ; v1(2817,4090) IC1_U5.6@2863.7,4090
  Bottom Layer w15: v1(1669,4067) 1728,4008 1835,4008 ; v1(2247,3815) 2250,3818 2425,3818 2444,3837 2444,3862.5 2428.5,3878 2345,3878 2326.33,3859.33 1983.67,3859.33 1835,4008 ; v1(2817,4090) 2589.58,4090 2557,4122.58 1996.58,4122.58 1882,4008 1835,4008
TXDO_U1: IC1_U1.7 R5_U1.1 | length 1060.6
  Top Layer w15: v1(2001.7,2182) 2001.7,2232.4 R5_U1.1@2027.8,2258.49 ; IC1_U1.7@2863.7,2143.45 2909.55,2143.45 v1(2910,2143)
  Bottom Layer w15: v1(2001.7,2182) 2031.7,2152 2361.35,2152 2364.21,2154.86 2407,2154.86 2418.86,2143 v1(2910,2143)
TXDO_U2: IC1_U2.7 R5_U2.1 | length 1023.2
  Top Layer w15: R5_U2.1@2027.8,2710.21 2096.79,2710.21 v1(2121.79,2735.21) ; IC1_U2.7@2863.7,2617.58 v1(2910,2617.58)
  Bottom Layer w15: v1(2121.79,2735.21) 2219.58,2637.42 2334.58,2637.42 2397.38,2574.62 2867.03,2574.62 v1(2910,2617.58)
TXDO_U3: IC1_U3.7 R5_U3.1 | length 1193.3
  Top Layer w15: R5_U3.1@2027.8,3185.07 2075,3137.86 2075,3107 v1(2168.1,3013.9) ; IC1_U3.7@2863.7,3091.72 2908.55,3091.72 v1(2909.28,3091)
  Bottom Layer w15: v1(2168.1,3013.9) 2168.1,2945.27 2226,2887.37 2351,2887.37 2364.31,2900.69 2718.96,2900.69 v1(2909.28,3091)
TXDO_U4: IC1_U4.7 R5_U4.1 | length 1042.1
  Top Layer w15: v1(2027.8,3618.2) R5_U4.1@2027.8,3657.57 ; v1(2854.37,3510.37) 2909.86,3565.86 IC1_U4.7@2863.7,3565.86
  Bottom Layer w15: v1(2027.8,3618.2) 2095,3551 2484,3551 2492.31,3559.31 2617.31,3559.31 2666.25,3510.37 v1(2854.37,3510.37)
TXDO_U5: IC1_U5.7 R5_U5.1 | length 1254.9
  Top Layer w15: R5_U5.1@2027.8,4150.07 2016,4138.27 2016,3941 2031,3926 2481,3926 2516.62,3961.62 2516.62,4006.62 2516.62,4017.82 2523.94,4025.14 2535.14,4025.14 2548.42,4025.14 2571.29,4048 2675,4048 2688,4035 2688,3983.65 2698.65,3973 2775,3973 2802,4000 2802,4025 2817,4040 IC1_U5.7@2863.7,4040
VCC_U1: C1_U1.2 C2_U1.1 D2_U1.1 D3_U1.1 F1_U1.2 IC1_U1.1 R1_U1.2 R6_U1.1 R22_U1.1 R24_U1.1 Rx.2 UPDU1_U1.01 | length 4744.3
  Top Layer w15: UPDU1_U1.01@1470,2220.02 1470,2150 1535,2085 C1_U1.2@1600.2,2085 ; v1(1689.76,2407) R1_U1.2@1689.76,2446.85 ; C2_U1.1@1852.95,2410 1852.95,2366 v1(1872,2366) ; F1_U1.2@2335,2454.27 2419,2454.27 v1(2419,2426) ; D2_U1.1@2515,2263.39 v1(2515,2203) 2538.17,2179.83 2593,2179.83 D3_U1.1@2647.83,2125 ; v1(2627,2296) 2627,2173.83 2647.83,2153 D3_U1.1@2647.83,2125 ; Rx.2@2835,1895 2835,1937.83 D3_U1.1@2647.83,2125 ; IC1_U1.1@2863.7,2443.45 IC1_U1.1@2873,2443.45 ; v1(2910,2443.45) IC1_U1.1@2873,2443.45 ; R6_U1.1@3692.32,2305 3665.83,2305 R22_U1.1@3612.68,2358.16 3549.52,2295 3355,2295 R24_U1.1@3355,2305 3355,2387.14 3300,2442.14 3251.86,2442.14 3212,2482 2895,2482 2873,2460 IC1_U1.1@2873,2443.45
  Bottom Layer w15: v1(2419,2426) 2359,2366 v1(1872,2366) 1730.76,2366 v1(1689.76,2407) 1689.76,2314.76 1640,2265 1514.98,2265 UPDU1_U1.01@1470,2220.02 2186.98,2220.02 2204,2203 v1(2515,2203) ; v1(2627,2296) 2762.55,2296 v1(2910,2443.45)
VCC_U2: C1_U2.2 C2_U2.1 D2_U2.1 D3_U2.1 F1_U2.2 IC1_U2.1 R1_U2.2 R6_U2.1 R22_U2.1 R24_U2.1 U1_U1.4 UPDU1_U2.01 | length 5387.1
  Top Layer w15: UPDU1_U2.01@1470,2692.06 1580.03,2582.03 1582.11,2582.03 1600.2,2563.94 C1_U2.2@1600.2,2560 ; v1@1686.65,2858.35 v1(1685,2860) 1685,2895.51 R1_U2.2@1689.76,2900.28 ; v1(1848.98,2851.02) C2_U2.1@1848.98,2895 1848.98,2918.5 1885.57,2918.5 1943.07,2976 2583.52,2976 2605,2954.52 2605,2928.17 2613.79,2919.38 2655.83,2919.38 2674.45,2938 2826.58,2938 2841.67,2922.91 2846.97,2917.58 2910,2917.58 2987.42,2995 3476.21,2995 3485,2986.21 3485,2859 ; U1_U1.4@2200.04,2441.87 2246.87,2441.87 v1(2247,2442) ; F1_U2.2@2335,2907.7 2377,2907.7 v1(2377,2866) ; v1(2490,2604) 2515,2629 D2_U2.1@2515,2723.39 ; v1(2567.83,2500) D3_U2.1@2647.83,2580 2631.71,2596.12 2617.04,2596.12 2609.16,2604 v1(2606.83,2604) ; R24_U2.1@3355,2885 3383,2885 3409,2859 3485,2859 ; R6_U2.1@3692.32,2885 3650.04,2885 R22_U2.1@3612.68,2922.37 3549.31,2859 3485,2859
  Bottom Layer w15: 1830.69,2870 1996,2870 2045.02,2820.98 2192.98,2820.98 2238,2866 v1(2377,2866) ; v1(1848.98,2851.02) 1830.69,2869.31 1721.48,2869.31 1713.82,2861.65 1686.65,2861.65 v1(1685,2860) 1675,2860 1582.2,2767.2 1582.2,2753.2 1521.06,2692.06 UPDU1_U2.01@1470,2692.06 1720.06,2442 v1(2247,2442) 2305,2500 v1(2567.83,2500) ; v1(2490,2604) v1(2606.83,2604)
VCC_U3: C1_U3.2 C2_U3.1 D2_U3.1 D3_U3.1 F1_U3.2 IC1_U3.1 R1_U3.2 R6_U3.1 R22_U3.1 R24_U3.1 U1_U2.4 UPDU1_U3.01 | length 4875.5
  Top Layer w15: UPDU1_U3.01@1470,3164.1 C1_U3.2@1582.07,3052.03 ; C1_U3.2@1582.11,3052.03 1600.2,3033.94 C1_U3.2@1600.2,3030 ; v1(1665,3316.24) 1689.76,3341 R1_U3.2@1689.76,3380 v1(1728.76,3341) ; v1(1848.98,3316.02) C2_U3.1@1848.98,3360 ; v1(2087,2895.29) U1_U2.4@2200.04,2895.29 2205.33,2900.59 2227.59,2900.59 v1(2247,2920) ; F1_U3.2@2335,3387.42 2384,3387.42 v1(2384,3350) ; D2_U3.1@2515,3193.39 v1(2616,3193.39) ; v1(2632.83,2945) 2647.83,2960 v1(2647.83,3005) D3_U3.1@2647.83,3027.17 ; D3_U3.1@2647.83,3045 D3_U3.1@2647.83,3027.17 ; IC1_U3.1@2863.7,3391.72 v1(2910,3391.72) 2938,3363.72 2938,3040 2886.88,2988.88 2686.12,2988.88 D3_U3.1@2647.83,3027.17 ; v1(3355,3424) R24_U3.1@3355,3495 3366.36,3506.36 3366.36,3548.21 3375.15,3557 3549.09,3557 3580.57,3525.51 3601.31,3525.51 3612.68,3514.15 R22_U3.1@3612.68,3486.58 3680.96,3486.58 3689.38,3495 R6_U3.1@3692.32,3495
  Bottom Layer w15: v1(1665,3316.24) 1512.86,3164.1 UPDU1_U3.01@1470,3164.1 1576.1,3058 1805,3058 1967.71,2895.29 v1(2087,2895.29) ; v1(1728.76,3341) 1824,3341 v1(1848.98,3316.02) 1882.95,3350 v1(2384,3350) ; v1(2247,2920) 2247,2907.37 2283.37,2907.37 2332.14,2956.14 2443.97,2956.14 2512.83,3025 2552.83,3025 v1(2632.83,2945) ; v1(2616,3193.39) 2647.83,3161.56 v1(2647.83,3005) ; v1(2910,3391.72) 2942.28,3424 v1(3355,3424)
VCC_U4: C1_U4.2 C2_U4.1 D2_U4.1 D3_U4.1 F1_U4.2 IC1_U4.1 R1_U4.2 R6_U4.1 R22_U4.1 R24_U4.1 U1_U3.4 UPDU1_U4.01 | length 4519.7
  Top Layer w15: UPDU1_U4.01@1470,3636.13 1555,3551.13 ; C1_U4.2@1600.2,3515 1600.2,3518.94 1582.11,3537.03 1569.1,3537.03 1555,3551.13 ; v1(1736.76,3798) R1_U4.2@1689.76,3845 1689.76,3806 1656.56,3782.72 1652.69,3780 1647.95,3780 1563.79,3780 1555,3771.21 1555,3551.13 ; v1(1850,3798) C2_U4.1@1850,3841.99 1864.15,3856.14 1864.15,3863.21 1872.94,3872 1975,3872 2008,3839 2008,3708.34 1992.66,3693 1992.66,3457.36 2008.31,3441.71 2068.49,3441.71 2135.18,3375.02 U1_U3.4@2200.04,3375.02 v1(2247,3375) ; F1_U4.2@2335,3852.42 v1(2419.33,3852.42) ; v1(2515,3535) D2_U4.1@2515,3651.39 ; v1(2593,3535) 2608,3520 D3_U4.1@2647.83,3520 2684.83,3483 2776,3483 2793,3500 2793,3752 2821,3780 2821,3841 2840.57,3860.57 2858.4,3860.57 IC1_U4.1@2863.7,3865.86 2994,3865.86 v1(3018.45,3890.31) ; v1(3355,4005) R24_U4.1@3355,4075 ; v1(3525,4019) 3612.68,4019 R22_U4.1@3612.68,4050.79 3636.89,4075 R6_U4.1@3692.32,4075
  Bottom Layer w15: v1(1736.76,3798) v1(1850,3798) 1891.33,3839.33 2406.24,3839.33 v1(2419.33,3852.42) ; v1(2247,3375) 2355,3375 v1(2515,3535) v1(2593,3535) ; v1(3018.45,3890.31) 3240.31,3890.31 v1(3355,4005) 3369,4019 v1(3525,4019)
VCC_U5: C1_U5.2 C2_U5.1 D2_U5.1 D3_U5.1 F1_U5.2 IC1_U5.1 R1_U5.2 R6_U5.1 R22_U5.1 R24_U5.1 U1_U4.4 UPDU1_U5.01 | length 5403
  Top Layer w15: C1_U5.2@1600.2,4000 1520,4000 1470,4050 UPDU1_U5.01@1470,4108.17 1434,4144.17 1434,4350 1460,4376 1648.76,4376 R1_U5.2@1689.76,4335 ; v1(1736.75,4288.01) R1_U5.2@1689.76,4335 ; v1(1850,4288.01) C2_U5.1@1850,4331.99 ; U1_U4.4@2200.04,3840.02 2217.31,3840.02 2222.6,3845.31 2222.6,3862.58 2245.35,3885.33 2245.35,3888.35 v1(2247,3890) ; F1_U5.2@2335,4345 v1@2412.5,4345 ; v1(2419.33,4345) v1@2412.5,4345 ; v1@2506.58,4069.84 v1(2515,4069.84) D2_U5.1@2515,4138.39 2515,4200 2426,4289 2426,4331.5 v1@2412.5,4345 ; v1(2611.34,3993.51) 2611.71,3993.88 2631.71,3993.88 D3_U5.1@2647.83,4010 ; IC1_U5.1@2863.7,4340 v1(2910.04,4340) ; R24_U5.1@3355,4595 3355,4650 ; R6_U5.1@3692.32,4595 3632.68,4595 R22_U5.1@3612.68,4615 3612.68,4672.32 3600,4685 3390,4685 3355,4650 ; R1_U5.2@1689.76,4335 2014.76,4660 3355,4660 3355,4650
  Bottom Layer w15: v1(1736.75,4288.01) v1(1850,4288.01) 1866.99,4305 2379.33,4305 v1(2419.33,4345) 2424.33,4340 v1(2910.04,4340) ; v1(2247,3890) 2247,3879.33 2299.66,3879.33 2490.18,4069.84 v1@2506.58,4069.84 ; v1(2515,4069.84) 2589.69,3995.16 2609.69,3995.16 v1(2611.34,3993.51)
VREF_U1: D1_U1.1 D1_U1.2 IC1_U1.3 R2_U1.1 | length 2171.5
  Top Layer w15: v1(2153,2177) v1@2153.21,2177.21 ; D1_U1.2@2187.2,2257.91 2100,2257.91 2082,2239.91 2082,2195.21 2100,2177.21 v1@2153.21,2177.21 ; R2_U1.1@2459.24,2120 v1(2459.24,2174.86) ; IC1_U1.3@2863.7,2343.45 2900,2343.45 2977,2266.45 2977,1850 2914,1787 2601,1787 2210.79,2177.21 D1_U1.1@2187.2,2177.21 v1@2153.21,2177.21
  Bottom Layer w15: v1(2153,2177) 2155.14,2174.86 v1(2459.24,2174.86)
VREF_U2: D1_U2.1 D1_U2.2 IC1_U2.3 R2_U2.1 | length 1249.5
  Top Layer w15: v1(2187.2,2767) D1_U2.2@2187.2,2709.63 D1_U2.1@2187.2,2628.92 2187.2,2600 2253.15,2534.05 2428.29,2534.05 R2_U2.1@2459.24,2565 ; v1(2771,2792.58) 2796,2817.58 IC1_U2.3@2863.7,2817.58
  Bottom Layer w15: v1(2187.2,2767) 2275.2,2679 2476,2679 2589.58,2792.58 v1(2771,2792.58)
VREF_U3: D1_U3.1 D1_U3.2 IC1_U3.3 R2_U3.1 | length 1337.8
  Top Layer w15: D1_U3.2@2199.41,3184.49 2112.5,3184.49 2095,3166.99 2095,3121.28 2112.5,3103.78 D1_U3.1@2199.41,3103.78 2199.41,3069.59 2267.76,3001.24 2420.48,3001.24 2500.36,3081.12 2676.63,3081.12 2690.45,3067.3 2690.45,3030.67 2690.45,3016.2 2697.77,3008.88 2763,3008.88 2785,3030.88 2785,3256 2820.72,3291.72 IC1_U3.3@2863.7,3291.72
VREF_U4: D1_U4.1 D1_U4.2 IC1_U4.3 R2_U4.1 | length 3653.7
  Top Layer w15: v1(2153,3576) v1@2153.28,3576.28 ; D1_U4.1@2187.2,3576.28 v1@2153.28,3576.28 ; D1_U4.2@2187.2,3656.99 2100,3656.99 2082,3638.99 2082,3594.28 2100,3576.28 v1@2153.28,3576.28 ; v1(2390,3475) 2415,3500 R2_U4.1@2459.24,3500 v1(2459.24,3576) ; IC1_U4.3@2863.7,3765.86 2909.86,3765.86 v1(2910,3766)
  Bottom Layer w15: v1(2153,3576) v1(2459.24,3576) ; v1(2390,3475) 2390,3474 2322,3406 1472,3406 1434,3444 1434,3754 1450,3770 1532.67,3845 1581,3845 1684,3742 2886,3742 v1(2910,3766)
VREF_U5: D1_U5.1 D1_U5.2 IC1_U5.3 R2_U5.1 | length 1270
  Top Layer w15: D1_U5.2@2187.2,4149.49 2100,4149.49 2082,4131.49 2082,4086.78 2100,4068.78 D1_U5.1@2187.2,4068.78 2187.2,4034.8 2232,3990 R2_U5.1@2459.24,3990 2434,3964.76 v1(2434,3951) ; v1(2785,4064.31) 2785,4192.38 2806.93,4214.31 2821.28,4214.31 2846.97,4240 IC1_U5.3@2863.7,4240
  Bottom Layer w15: v1(2434,3951) 2556.86,3951 2558.67,3949.2 2669.89,3949.2 v1(2785,4064.31)
pads on no net: IC1_U1.2 IC1_U1.12 IC1_U2.2 IC1_U2.12 IC1_U3.2 IC1_U3.12 IC1_U4.2 IC1_U4.12 IC1_U5.2 IC1_U5.12 J1.1 J1.2 J1.3 J1.4 J2.1 J2.2 J2.3 J2.4 J3.1 J3.2 J3.3 J3.4 Power.11 Power.12 Thermal.11 Thermal.12

## Silkscreen, mask and mechanical layers (free items; w line width, h text height)
Mechanical 1:
  the board outline again, w10